# EAGLE board 555Schematic 3D view (EAGLE 9.7.0)
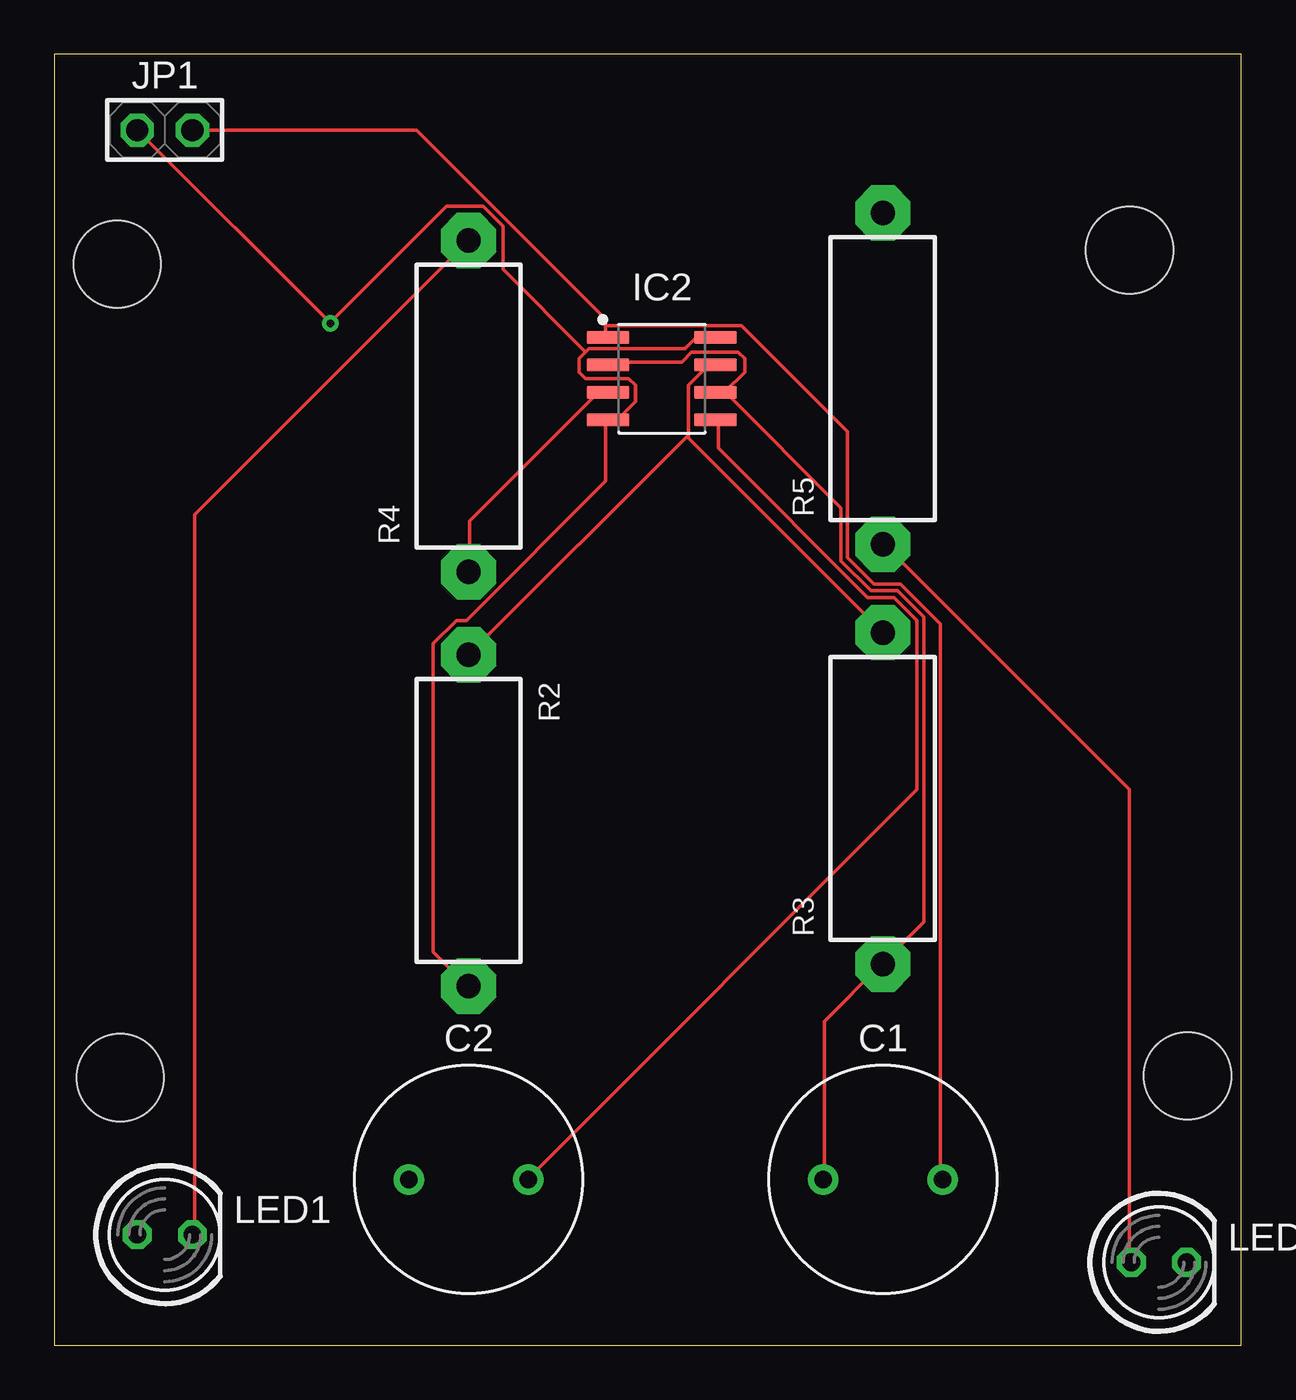
[diagram p0: board, top side]
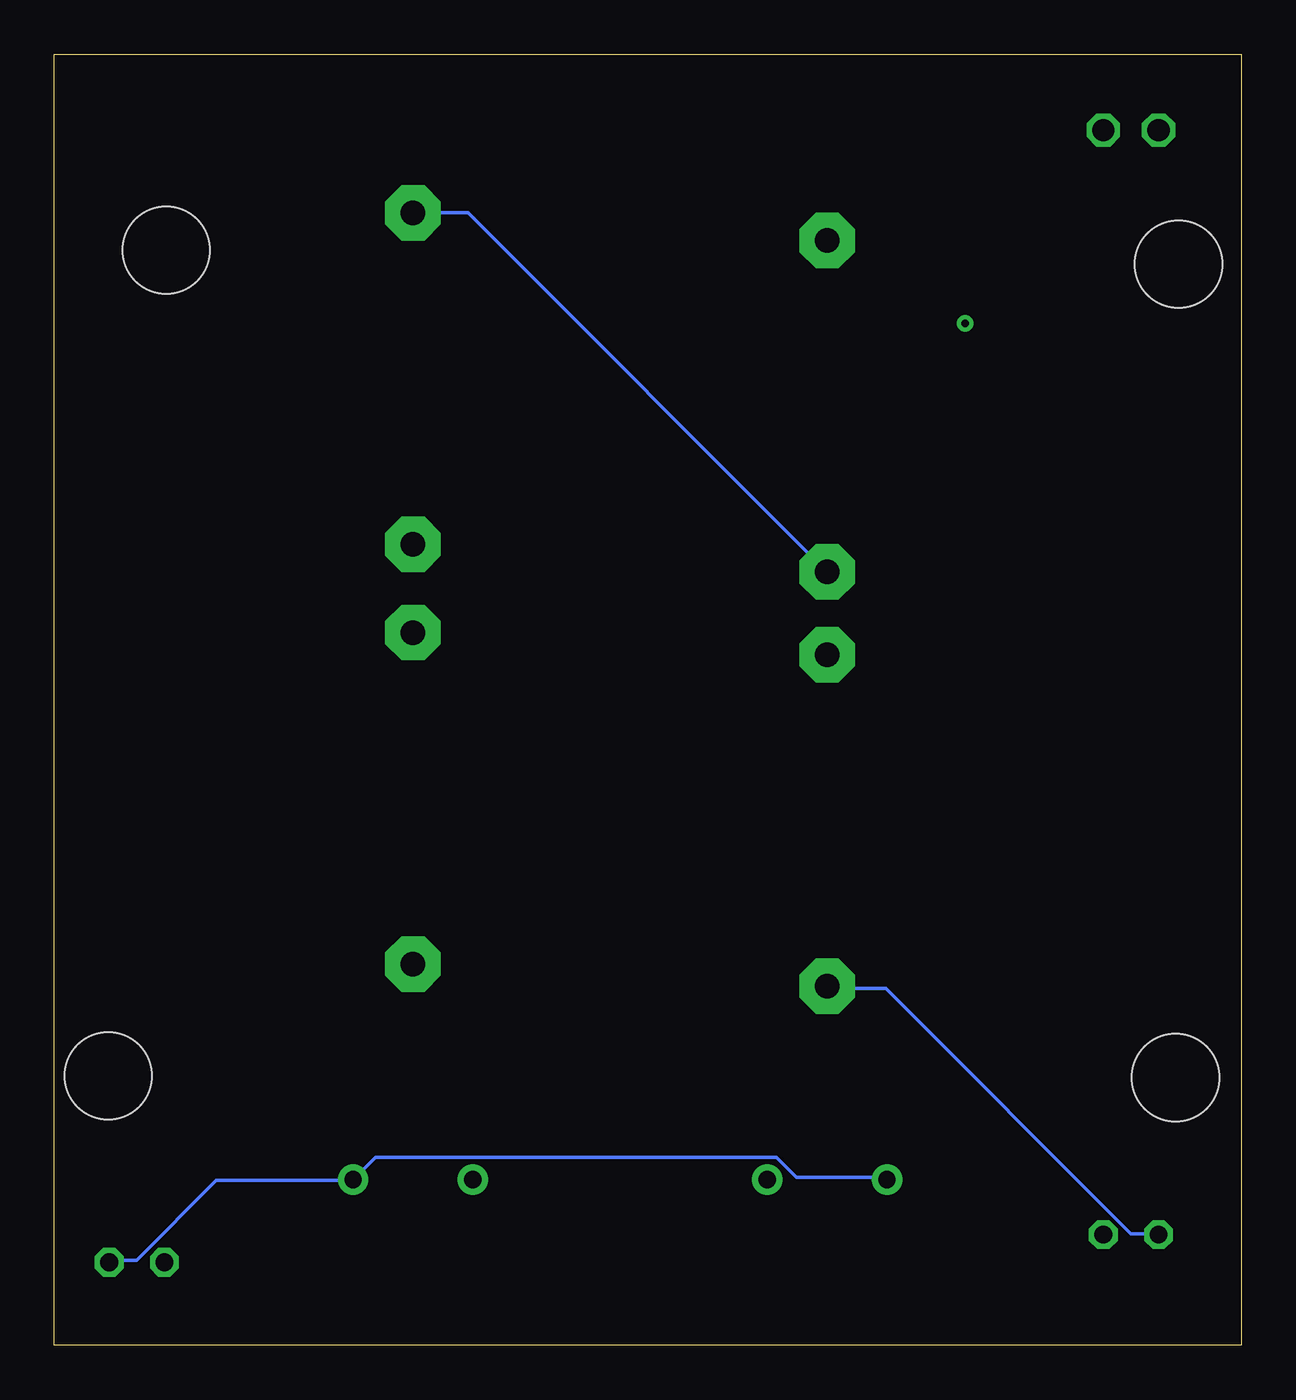
[diagram p1: board, bottom side, seen from below]

Size 54.59 x 59.36 mm. Coordinates in mm from the lower left corner, seen from the top.
Outline: 0,59.36 0,0 54.59,0 54.59,59.36 0,59.36
Copper layers (1*16): Top / Bottom
Stack-up Default Layer Stack: Top SilkScreen Epoxy Ink / Top SolderMask SR:Green 0.0254mm Dk 4.3 / Top Surface Finish Lead-Free 0.02mm / Top CuFoil:007 0.035mm / Dielectric-1 User Defined 1.5mm / Bottom CuFoil:007 0.035mm / Bottom Surface Finish Lead-Free 0.02mm / Bottom SolderMask SR:Green 0.0254mm Dk 4.3 / Bottom SilkScreen Epoxy Ink
Design rules: minimum copper width 6mil, minimum drill size 0.35mm, copper clearance wire_polygon to wire_polygon 6mil, copper clearance wire_polygon to pad_smd 6mil, copper clearance wire_polygon to via 6mil, copper clearance pad_smd to pad_smd 6mil, copper clearance pad_smd to via 6mil, copper clearance via to via 6mil, copper clearance smd to pad (same net) 6mil, copper clearance smd to via (same net) 6mil, copper clearance smd to smd (same net) 6mil, dimension clearance 40mil, via restrict clearance 0mil, restrict clearance 0mil, drill distance 6mil, keepout clearance 0mil
Holes 4 mm at 52.11,12.39 3.03,12.3 2.89,49.71 49.44,50.36

## Footprints (pad centres in the part's own frame; a part is rotated, then mirrored left to right if it is on the bottom)
CAPRD550W60D1025H1250B = drill 0.8 pad 1.4: 1 -2.75,0; 2 2.75,0
D0008A = smd 1.965 x 0.602: 1 -2.47,1.905; 2 -2.47,0.635; 3 -2.47,-0.635; 4 -2.47,-1.905; 5 2.47,-1.905; 6 2.47,-0.635; 7 2.47,0.635; 8 2.47,1.905
1X02 = drill 1.016 octagon: 1 -1.27,0; 2 1.27,0
LED5MM = drill 0.813 octagon: A -1.27,0; K 1.27,0
RESISTOR-POWER_AC03 = drill 1.118 pad 2.54 octagon: 1 -7.62,0; 2 7.62,0

## Placement (x,y rotation side)
C1  1u  [CAPRD550W60D1025H1250B]  38.1,7.62 0 top
C2  10n  [CAPRD550W60D1025H1250B]  19.05,7.62 0 top
IC2  IC-555  [D0008A]  27.94,44.45 0 top
JP1  PINHD-1X2  [1X02]  5.08,55.88 0 top
LED1  [LED5MM]  5.08,5.08 0 top
LED2  [LED5MM]  50.8,3.81 0 top
R2  1K  [RESISTOR-POWER_AC03]  19.05,24.13 270 top
R3  470K  [RESISTOR-POWER_AC03]  38.1,25.15 90 top
R4  220k  [RESISTOR-POWER_AC03]  19.05,43.18 90 top
R5  220k  [RESISTOR-POWER_AC03]  38.1,44.45 90 top

## Library data of the parts
C1 C2 = Tinkercad; CATEGORY: Capacitor
IC2 = Tutorial - Fusion 360
JP1 = Connector; CATEGORY: Connectors; DESCRIPTION: Header-Straight-2 Position; PACKAGE_TYPE: Through Hole; PITCH: 0.100" (2.54mm); SUBCATEGORY: Headers; TYPE: Male Pins
LED1 LED2 = led
R2 R3 = LinkedLibrary52101
R4 = LinkedLibrary52101; R3: 220k
R5 = LinkedLibrary52101; R4: 220k

## Nets
GND: C1.2 C2.1 IC2.1 JP1.2 LED2.K
N$1: LED1.K R4.2
N$2: IC2.3 R4.1 R5.2
N$3: LED2.A R5.1
N$5: IC2.7 R2.1 R3.2
N$6: C1.1 IC2.2 IC2.6 R3.1
N$8: C2.2 IC2.5
V+: IC2.4 IC2.8 JP1.1 LED1.A R2.2

## Tracks (layer width: path | path; a pad name or v marks a point on that pad's centre or on a via)
GND
  Top 0.152: 25.35,46.89 25.35,47.19 16.66,55.88 JP1.2 | 25.35,46.89 25.35,46.43 IC2.1 | 25.35,46.89 31.6,46.89 36.47,42.01 36.47,36.22 37.69,35 38.91,35 40.74,33.17 40.74,7.72 C1.2
  Bottom 0.152: LED2.K 52.02,3.91 50.8,3.91 47.14,7.57 40.89,7.57 C1.2 40.74,7.72 39.83,8.64 21.39,8.64 20.47,7.72 16.36,7.72 C2.1
N$1
  Top 0.152: R4.2 6.45,38.2 6.45,5.13 LED1.K
N$2
  Top 0.152: IC2.3 25.35,43.69 24.89,43.69 19.1,37.9 19.1,35.61 R4.1
  Bottom 0.152: R5.2 35.56,52.07 R4.1
N$3
  Top 0.152: LED2.A 49.43,3.91 49.43,25.55 38.15,36.83 R5.1
N$5
  Top 0.152: 29.16,41.86 29.16,41.71 R3.2 | 29.16,41.86 29.16,44.15 30.07,45.06 30.38,45.06 IC2.7 | 29.16,41.86 R2.1
N$6
  Top 0.152: 30.84,43.84 31.75,44.76 31.75,45.36 31.44,45.67 29.31,45.67 28.85,45.21 25.5,45.21 IC2.2 | 30.84,43.84 30.53,43.84 IC2.6 30.84,43.84 | C1.1 35.41,7.72 35.41,14.88 38,17.48 R3.1 38.15,17.63 39.98,19.46 39.98,33.48 38.76,34.7 37.54,34.7 36.17,36.07 36.17,38.51 30.84,43.84
N$8
  Top 0.152: IC2.5 30.53,42.47 30.53,41.25 37.39,34.39 38.61,34.39 39.67,33.33 39.67,25.55 21.84,7.72 C2.2
V+  (via drill 0.35)
  Top 0.152: JP1.1 v12.7,46.99 12.7,47.04 18.03,52.38 19.71,52.38 20.62,51.46 20.62,49.48 24.44,45.67 | 24.44,45.67 24.59,45.82 29.01,45.82 29.46,46.28 30.38,46.28 IC2.8 | 24.44,45.67 24.13,45.36 24.13,44.76 24.44,44.45 26.42,44.45 26.72,44.15 26.72,43.38 25.96,42.62 25.5,42.62 IC2.4 25.35,42.47 25.35,39.73 18.95,33.33 18.49,33.33 17.42,32.26 17.42,18.09 18.95,16.56 R2.2
  Bottom 0.152: LED1.A 3.86,5.13 5.08,5.13 16.36,16.41 18.95,16.41 R2.2